# EAGLE board usb-interface (EAGLE 9.6.2)
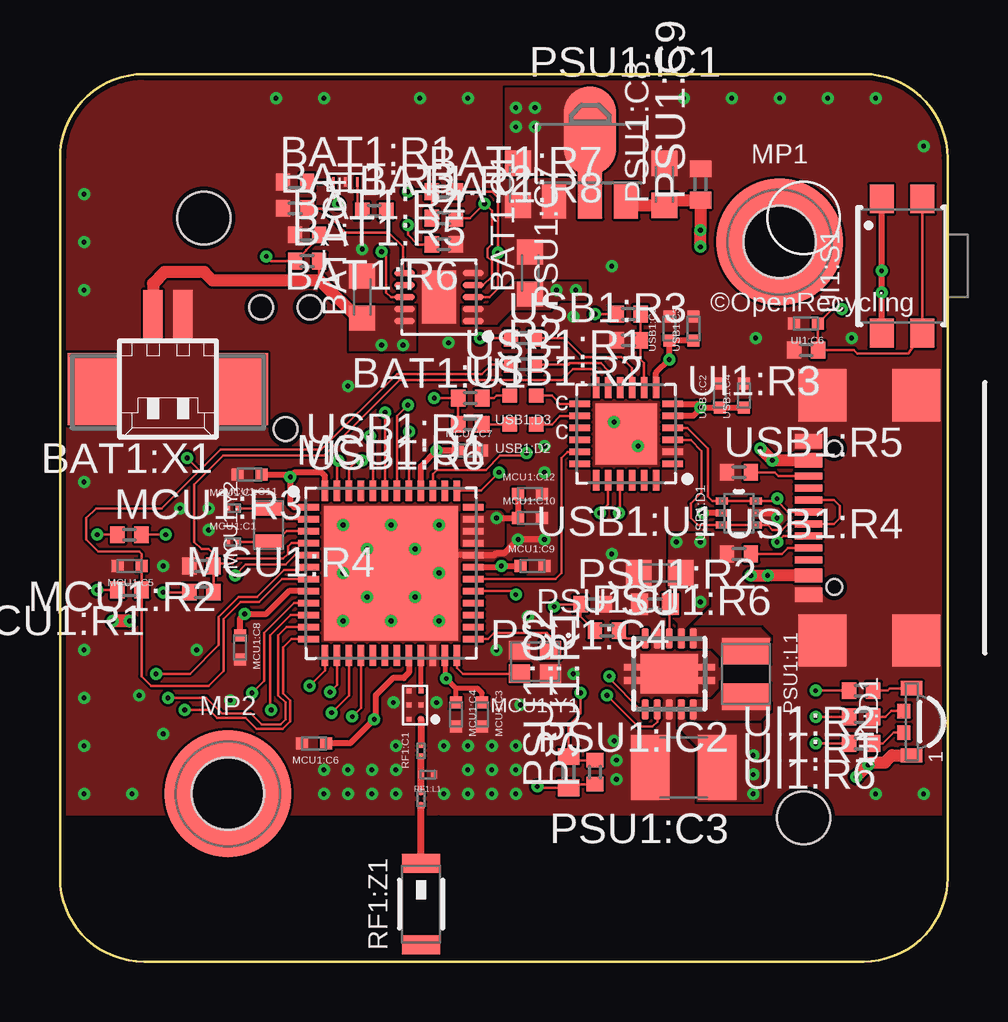
[diagram p0: board, top side]
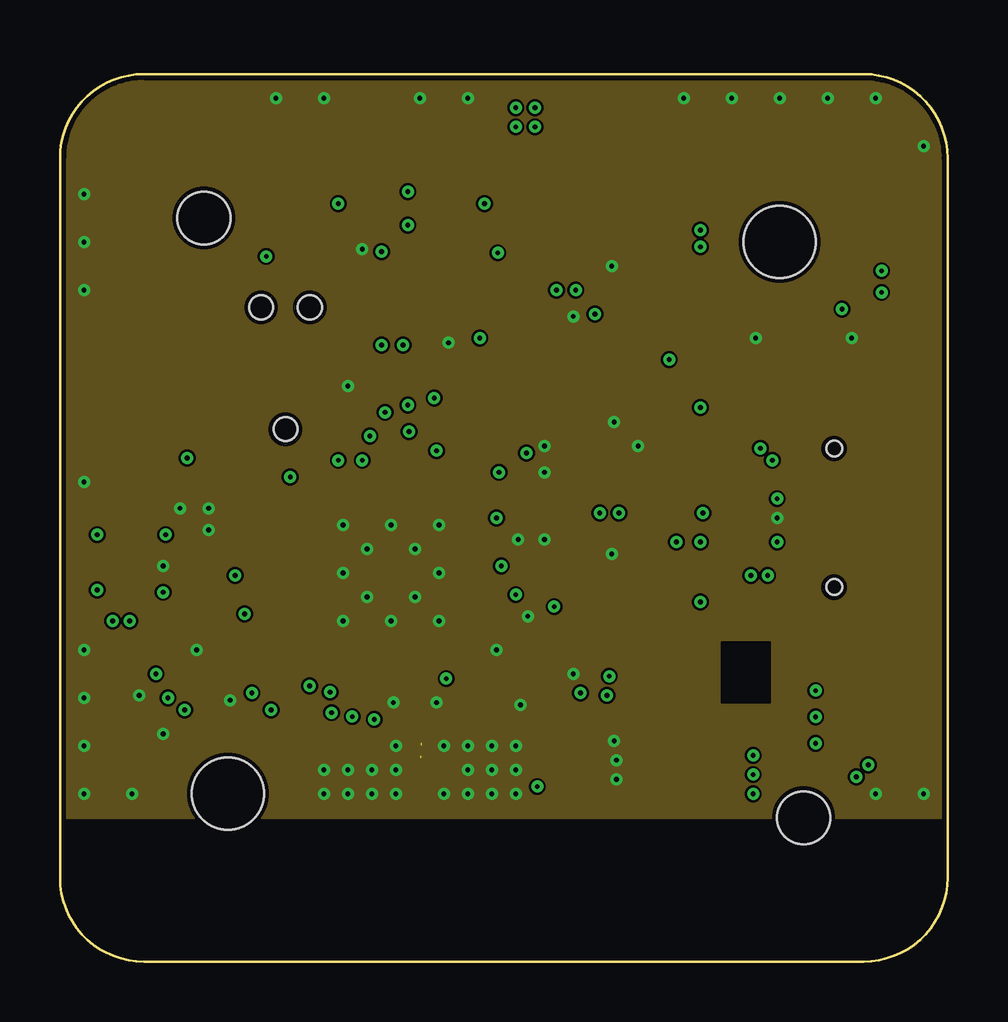
[diagram p1: board, inner layer Route2]
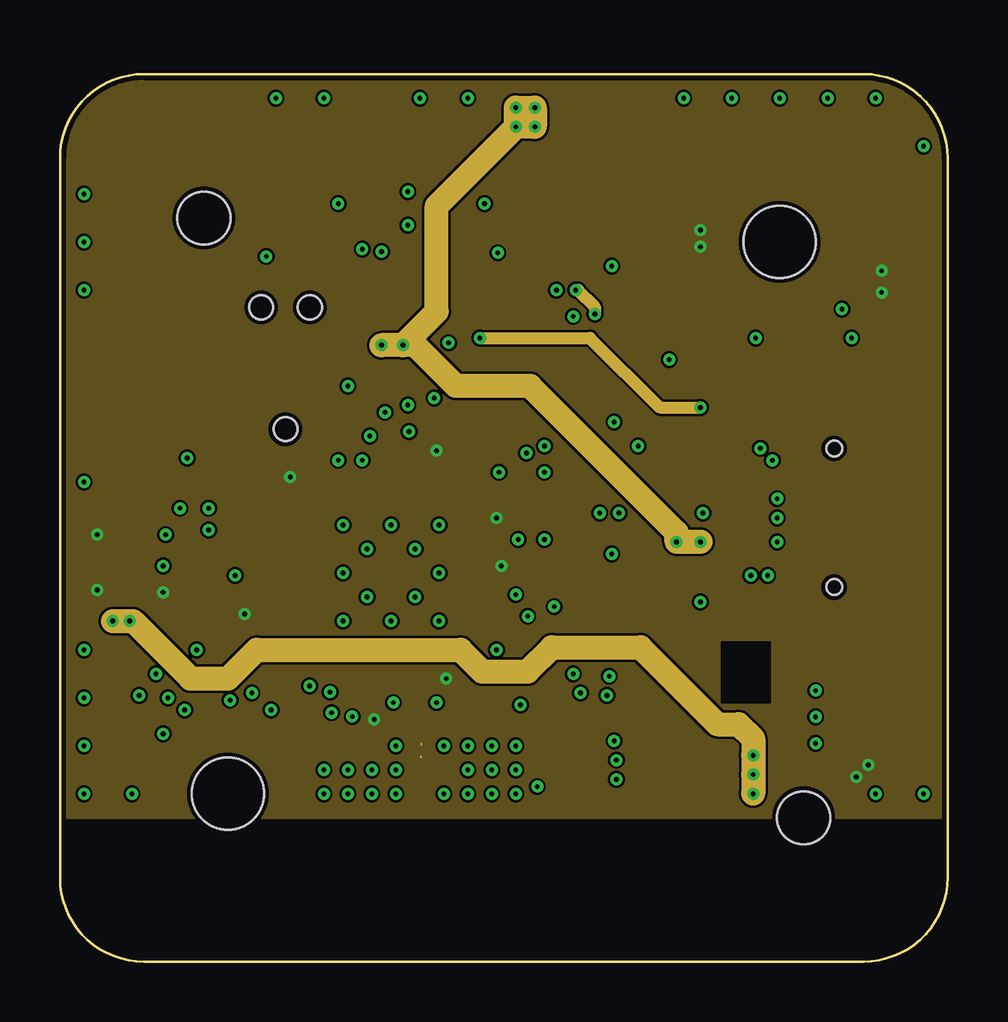
[diagram p2: board, inner layer Route15]
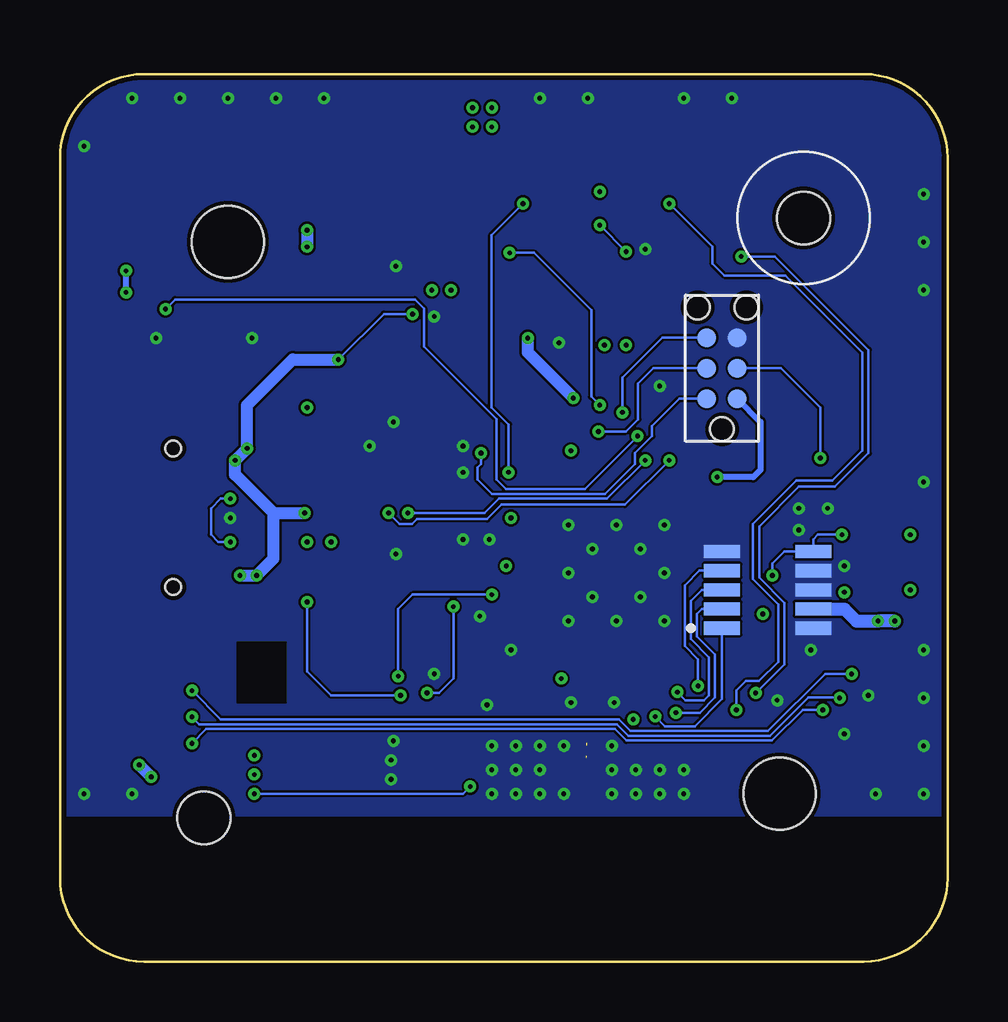
[diagram p3: board, bottom side, seen from below]

Size 37 x 37 mm. Coordinates in mm from the lower left corner, seen from the top.
Outline: 0,3.5 0,33.5 arc-90 3.5,37 33.5,37 arc-90 37,33.5 37,3.5 arc-90 33.5,0 3.5,0 arc-90 0,3.5
Copper layers (1+2*15+16): Top 0.035mm / dielectric 0.2mm / Route2 0.0175mm / dielectric 0.465mm / Route15 0.0175mm / dielectric 0.2mm / Bottom 0.035mm
Design rules "JLC4LayerRules *": minimum track width 0.1mm, minimum drill 0.2mm, track to track 0.1mm, track to pad 0.2mm, pad to pad 0.128mm, via to via 0.29mm, smd to smd 0mil, copper to edge 0.2mm, drill to drill 0.2mm, minimum pad ring 0.15mm, minimum via ring 0.15mm, stop-mask expansion 4mil, vias tented up to drill 0.2mm, thermal gap 10mil
Net classes: 0 default: width 0.1 mm, drill 0.2 mm, clearance 0.1 mm; 1 50Ohm: width 0.29 mm, clearance 0.2 mm
Holes 2.2 mm at 6,31 31,6

## Footprints (pad centres in the part's own frame; a part is rotated, then mirrored left to right if it is on the bottom)
C0603K = smd 1.05 x 1.08: 1 -0.875,0; 2 0.875,0
CSD18541F5 = smd 0.39 x 0.15: 1 0,0.5; 2 0,0; 3 0,-0.5
R0402 = smd 0.6 x 0.7: 1 -0.5,0; 2 0.5,0
SON50P300X300X100-11T140X220N = smd 0.86 x 0.264: 1 -1.435,1; 2 -1.435,0.5; 3 -1.435,0; 4 -1.435,-0.5; 5 -1.435,-1; 6 1.435,-1; 7 1.435,-0.5; 8 1.435,0; 9 1.435,0.5; 10 1.435,1 | smd 1.4 x 2.2: 11 0,0
53261-02 = smd 0.8 x 2: 1 0.625,-2.5; 2 -0.625,-2.5 | smd 2.1 x 3: S1 3.125,0.625; S2 -3.125,0.625
WCAP-CSRF_0201 = smd 0.21 x 0.3: 1 -0.22,0; 2 0.22,0
WCAP-CSGP_0402 = smd 0.5 x 0.5: 1 0.5,0; 2 -0.5,0
CSP-6 = smd 0.2 x 0.2: 1 -0.587,-0.5; 2 0,-0.5; 3 0.587,-0.5; 4 0.587,0; 5 0,0; 6 -0.587,0
QFN50P700X700X60-49T560N = smd 0.86 x 0.27: 1 -3.435,2.75; 2 -3.435,2.25; 3 -3.435,1.75; 4 -3.435,1.25; 5 -3.435,0.75; 6 -3.435,0.25; 7 -3.435,-0.25; 8 -3.435,-0.75; 9 -3.435,-1.25; 10 -3.435,-1.75; 11 -3.435,-2.25; 12 -3.435,-2.75; 25 3.435,-2.75; 26 3.435,-2.25; 27 3.435,-1.75; 28 3.435,-1.25; 29 3.435,-0.75; 30 3.435,-0.25; 31 3.435,0.25; 32 3.435,0.75; 33 3.435,1.25; 34 3.435,1.75; 35 3.435,2.25; 36 3.435,2.75 | smd 0.27 x 0.86: 13 -2.75,-3.435; 14 -2.25,-3.435; 15 -1.75,-3.435; 16 -1.25,-3.435; 17 -0.75,-3.435; 18 -0.25,-3.435; 19 0.25,-3.435; 20 0.75,-3.435; 21 1.25,-3.435; 22 1.75,-3.435; 23 2.25,-3.435; 24 2.75,-3.435; 37 2.75,3.435; 38 2.25,3.435; 39 1.75,3.435; 40 1.25,3.435; 41 0.75,3.435; 42 0.25,3.435; 43 -0.25,3.435; 44 -0.75,3.435; 45 -1.25,3.435; 46 -1.75,3.435; 47 -2.25,3.435; 48 -2.75,3.435 | smd 5.6 x 5.6: 49 0,0 | drill 0.2 pad 0.5: P$1 1,1; P$2 -1,1; P$3 -1,-1; P$4 1,-1; P$5 2,-2; P$6 0,-2; P$7 -2,-2; P$8 -2,0; P$9 -2,2; P$10 0,2; P$11 2,2; P$12 2,0
TC2030-NL = smd 0.787 x 0.787: 1 -0.635,-1.27; 2 0.635,-1.27; 3 -0.635,-2.54; 4 0.635,-2.54; 5 -0.635,-3.81; 6 0.635,-3.81 | hole 0.991: 0,0; -1.016,-5.08; 1.016,-5.08
WE-XTAL_IQXC-42 = smd 0.875 x 0.775: 1 -0.637,-0.487; 2 0.637,-0.487; 3 0.637,0.487; 4 -0.637,0.487
WE-XTAL_IQXC-25 = smd 0.6 x 1.1: 1 -0.7,0; 2 0.7,0
WA-SMSI_9774015243 = smd 5.3 x 5.3: 1 0,0 | hole 3: 0,0
C0402 = smd 0.7 x 0.9: 1 -0.65,0; 2 0.65,0
C1210 = smd 1.6 x 2.7: 1 -1.4,0; 2 1.4,0
SOT89 = smd 1 x 1.5: 1 -1.499,-1.981; 3 1.499,-1.981 | smd 1 x 2: 2 0,-1.727 | smd 2.2 x 3.7: 2@1 0,0.94
S-PDSO-N10 = smd 0.28 x 0.85: 1 -1,-1.475; 2 -0.5,-1.475; 3 0,-1.475; 4 0.5,-1.475; 5 1,-1.475; 6 1,1.475; 7 0.5,1.475; 8 0,1.475; 9 -0.5,1.475; 10 -1,1.475 | smd 2.4 x 1.65: PP 0,0 | smd 3.8 x 0.28: PP@1 0,0.275; PP@2 0,-0.275
WE-LQS_2512 = smd 1.1 x 2: 1 -0.95,0; 2 0.95,0
WE-TCI_0201 = smd 0.25 x 0.3: 1 -0.275,0; 2 0.275,0
WE-MCA_7488930245 = smd 0.8 x 1.6: 1 1.7,0; 2 -1.7,0
WL-SFSW_1204 = smd 0.6 x 0.9: 1 -1.4,0; 4 1.4,0 | smd 0.6 x 0.55: 2 -0.45,0.325; 3 0.45,0.325
4343X10458XX = smd 1.2 x 1: 1 2.8,0.85; 2 2.8,-0.85; 3 -2.8,0.85; 4 -2.8,-0.85
WE-TVS_SOT563 = smd 0.3 x 0.5: 1 -0.5,-0.7; 2 0,-0.7; 3 0.5,-0.7; 4 0.5,0.7; 5 0,0.7; 6 -0.5,0.7
WL-SMCC_0402 = smd 0.6 x 0.6: 1 -0.55,0; 2 0.55,0
QFN50P400X400X80-25T255N = smd 0.86 x 0.264: 1 -1.935,1.25; 2 -1.935,0.75; 3 -1.935,0.25; 4 -1.935,-0.25; 5 -1.935,-0.75; 6 -1.935,-1.25; 13 1.935,-1.25; 14 1.935,-0.75; 15 1.935,-0.25; 16 1.935,0.25; 17 1.935,0.75; 18 1.935,1.25 | smd 0.264 x 0.86: 7 -1.25,-1.935; 8 -0.75,-1.935; 9 -0.25,-1.935; 10 0.25,-1.935; 11 0.75,-1.935; 12 1.25,-1.935; 19 1.25,1.935; 20 0.75,1.935; 21 0.25,1.935; 22 -0.25,1.935; 23 -0.75,1.935; 24 -1.25,1.935 | smd 2.55 x 2.55: 25 0,0 | drill 0.2 pad 0.5: P$1 -0.5,0.5; P$2 0.5,-0.5
USBCGCT = smd 0.6 x 1.15: A1B12 -3.2,0; A4B9 -2.4,0; B1A12 3.2,0; B4A9 2.4,0 | smd 0.3 x 1.15: A5 -1.25,0; A6 -0.25,0; A7 0.25,0; A8 1.25,0; B5 1.75,0; B6 0.75,0; B7 -0.75,0; B8 -1.75,0 | smd 2.18 x 2: SHIELD@1 -5.11,-0.575; SHIELD@2 5.11,-0.575; SHIELD@3 5.11,-4.505; SHIELD@4 -5.11,-4.505 | hole 0.65: -2.89,-1.075; 2.89,-1.075
524651071 = smd 0.55 x 1.5: 1 -1.6,1.9; 2 -0.8,1.9; 3 0,1.9; 4 0.8,1.9; 5 1.6,1.9; 6 -1.6,-1.9; 7 -0.8,-1.9; 8 0,-1.9; 9 0.8,-1.9; 10 1.6,-1.9

## Placement (x,y rotation side)
BAT1:C1  4.7uF  [C0603K]  19.6,28.7 90 top
BAT1:C4  4.7uF  [C0603K]  12.6,27.7 90 top
BAT1:Q1  CSD18541F5  [CSD18541F5]  11.9,32.5 90 top
BAT1:R1  10k  [R0402]  9.8,32.5 0 top
BAT1:R2  1k  [R0402]  13.1,31.3 0 top
BAT1:R3  10k  [R0402]  9.8,31.4 0 top
BAT1:R4  10k  [R0402]  10.3,30.3 0 top
BAT1:R5  10k  [R0402]  10.3,29.2 0 top
BAT1:R6  10k  [R0402]  16,29.9 180 top
BAT1:R7  10k  [R0402]  16,32.1 0 top
BAT1:R8  10k  [R0402]  16,31 0 top
BAT1:U1  MCP73833  [SON50P300X300X100-11T140X220N]  15.8,27.7 180 top
BAT1:X1  53261-02  [53261-02]  4.5,24.5 180 top
MCU1:C1  9pF  [WCAP-CSRF_0201]  7.2,17.5 0 top
MCU1:C2  9pF  [WCAP-CSRF_0201]  7.2,18.9 0 top
MCU1:C3  100 pF  [WCAP-CSGP_0402]  17.6,10.3 270 top
MCU1:C4  100 nF  [WCAP-CSGP_0402]  16.5,10.3 270 top
MCU1:C5  100 nF  [WCAP-CSGP_0402]  2.9,16.5 180 top
MCU1:C6  100 nF  [WCAP-CSGP_0402]  10.6,9.1 180 top
MCU1:C7  100 nF  [WCAP-CSGP_0402]  17.1,21.3 0 top
MCU1:C8  100 nF  [WCAP-CSGP_0402]  7.5,13.1 270 top
MCU1:C9  100 nF  [WCAP-CSGP_0402]  19.7,16.5 0 top
MCU1:C10  1 µF  [WCAP-CSGP_0402]  19.6,18.5 0 top
MCU1:C11  100 nF  [WCAP-CSGP_0402]  7.9,20.3 180 top
MCU1:C12  100 nF  [WCAP-CSGP_0402]  19.6,19.5 0 top
MCU1:FLT1  MLPF-WB55-01E3  [CSP-6]  14.55,10.7 90 top
MCU1:R1  100k  [R0402]  2.9,15.5 180 top
MCU1:R2  100k  [R0402]  5.9,16.5 180 top
MCU1:R3  100k  [R0402]  2.9,17.8 0 top
MCU1:R4  0R  [R0402]  5.9,15.4 0 top
MCU1:U1  STM32WB30CE  [QFN50P700X700X60-49T560N]  13.8,16.2 0 top
MCU1:X1  TC2030-NLTC2030-IDC-NL-FP  [TC2030-NL]  9.4,22.2 180 bottom
MCU1:Y1  NX2016SA-32MHz  [WE-XTAL_IQXC-42]  19.8,12.5 180 top
MCU1:Y2  32.768kHz  [WE-XTAL_IQXC-25]  8.7,18.2 90 top
MP1  9774015243  [WA-SMSI_9774015243]  30,30 0 top
MP2  9774015243  [WA-SMSI_9774015243]  7,7 0 top
PSU1:C1  4.7uF  [C0603K]  25,16.2 180 top
PSU1:C2  33pF  [C0402]  21.2,7.9 90 top
PSU1:C3  4.7uF/25V  [C1210]  26,8.1 180 top
PSU1:C4  47nF  [C0402]  24.8,14.9 180 top
PSU1:C7  4.7uF  [C0603K]  19.1,32.4 270 top
PSU1:C8  4.7uF  [C0603K]  25.2,32.4 90 top
PSU1:C9  100nF  [C0402]  26.7,32.4 90 top
PSU1:IC1  MCP170333MB  [SOT89]  22.1,33.7 0 top
PSU1:IC2  TPS61080QFN10  [S-PDSO-N10]  25.4,12 180 top
PSU1:L1  4.7uH  [WE-LQS_2512]  28.6,12 270 top
PSU1:R1  437k  [R0402]  22.3,7.9 90 top
PSU1:R2  49.9k  [R0402]  22.2,14.9 0 top
PSU1:R6  100R  [R0402]  22.8,13.8 0 top
R2  0R  [R0402]  19.3,24.9 0 top
RF1:C1  1.2pF  [WCAP-CSRF_0201]  15.05,8.8 90 top
RF1:L1  2.7nH  [WE-TCI_0201]  15.32,7.8 180 top
RF1:L2  3.3nH  [WE-TCI_0201]  15.05,6.8 90 top
RF1:Z1  2400-2500 MHz  [WE-MCA_7488930245]  15.05,2.4 90 top
UI1:C6  100 nF  [WCAP-CSGP_0402]  31.1,26.6 180 top
UI1:D1  155124M173200  [WL-SFSW_1204]  35.5,10 90 top
UI1:R1  120R  [R0402]  33.4,10.2 180 top
UI1:R2  270R  [R0402]  33.4,11.3 180 top
UI1:R3  100k  [R0402]  31.1,25.5 180 top
UI1:R6  43R  [R0402]  33.4,9.1 180 top
UI1:S1  434331045822  [4343X10458XX]  35.1,29 90 top
USB1:C1  100 nF  [WCAP-CSGP_0402]  25.4,26.4 90 top
USB1:C2  100 nF  [WCAP-CSGP_0402]  27.5,23.6 90 top
USB1:C3  1 µF  [WCAP-CSGP_0402]  26.4,26.4 90 top
USB1:C4  1 µF  [WCAP-CSGP_0402]  28.5,23.6 90 top
USB1:D1  5Vdc  [WE-TVS_SOT563]  28.3,18.7 90 top
USB1:D2  150040GS73240  [WL-SMCC_0402]  19.3,22.4 180 top
USB1:D3  150040YS73240  [WL-SMCC_0402]  19.3,23.6 180 top
USB1:R1  22.1k  [R0402]  23.7,27 180 top
USB1:R2  47.5k  [R0402]  23.7,25.9 180 top
USB1:R3  1k  [R0402]  19.3,26 0 top
USB1:R4  5.1k  [R0402]  28.3,17 0 top
USB1:R5  5.1k  [R0402]  28.3,20.4 0 top
USB1:R6  1k  [R0402]  17.1,22.4 180 top
USB1:R7  1k  [R0402]  17.1,23.5 180 top
USB1:U1  CP2102N  [QFN50P400X400X80-25T255N]  23.6,22 180 top
USB1:X1  USB4110  [USBCGCT]  31.2,18.5 90 top
X1  524651071  [524651071]  7.5,15.5 90 bottom

## Library data of the parts
BAT1:C1 BAT1:C4 PSU1:C1-PSU1:C4 PSU1:C7-PSU1:C9 = rcl; SPICEPREFIX: C
BAT1:Q1 BAT1:U1 MCU1:FLT1 MCU1:U1 USB1:U1 = spectrometer
BAT1:R1-BAT1:R8 MCU1:R1-MCU1:R4 PSU1:R1 PSU1:R2 PSU1:R6 R2 UI1:R1-UI1:R3 UI1:R6 USB1:R1-USB1:R7 = rcl; SPICEPREFIX: R
BAT1:X1 = connectors; MF: MOLEX; OC_FARNELL: 1125373; OC_NEWARK: unknown
MCU1:C1 MCU1:C2 = Wurth_Capacitors_WCAP-CSRF; CERAMIC-TYPE: NP0 Class I; DATASHEET-URL: https://www.we-online.com/catalog/datasheet/885392004010.pdf; H: 0.3mm; PART-NUMBER: 885392004010; QMIN: 400+20C; RISO: 10GOhm; TECHNICAL-REFERENCE: NP002019R0D025DFCT1R000; TOL-C: ±0.5pF; VR: 25V(DC)
MCU1:C3 = Wurth_Capacitors_WCAP-CSGP; CERAMIC-TYPE: NP0 Class I; DATASHEET-URL: https://www.we-online.com/catalog/datasheet/885012005013.pdf; DF: -; H: 0.5mm; OPERATING-TEMPERATURE: -55 °C up to +125 °C; PART-NUMBER: 885012005013; QMIN: 1000; RISO: 10GOhm; TECHNICAL-REFERENCE: NP00402101J010DFCT10000; TOL-VALUE: ±5%; VR: 10V(DC)
MCU1:C4-MCU1:C9 MCU1:C11 MCU1:C12 UI1:C6 USB1:C1 USB1:C2 = Wurth_Capacitors_WCAP-CSGP; CERAMIC-TYPE: X5R Class II; DATASHEET-URL: https://www.we-online.com/catalog/datasheet/885012105010.pdf; DF: 5%; H: 0.5mm; OPERATING-TEMPERATURE: -55 °C up to +85 °C; PART-NUMBER: 885012105010; QMIN: -; RISO: 5GOhm; TECHNICAL-REFERENCE: X5R0402104M010DFCT10000; TOL-VALUE: ±20%; VR: 10V(DC)
MCU1:C10 USB1:C3 USB1:C4 = Wurth_Capacitors_WCAP-CSGP; CERAMIC-TYPE: X5R Class II; DATASHEET-URL: https://www.we-online.com/catalog/datasheet/885012105012.pdf; DF: 15%; H: 0.5mm; OPERATING-TEMPERATURE: -55 °C up to +85 °C; PART-NUMBER: 885012105012; QMIN: -; RISO: 0.05GOhm; TECHNICAL-REFERENCE: X5R0402105M010DFCT10000; TOL-VALUE: ±20%; VR: 10V(DC)
MCU1:X1 USB1:X1 X1 = connectors
MCU1:Y1 = Wurth_Quartz Crystals & Oscillators_WE-XTAL; C-LOAD: 10pF; DATASHEET-URL: https://www.we-online.com/catalog/datasheet/830059597.pdf; MOUNT: SMT; PART-NUMBER: 830059597; STABILITY: 20ppm; TOLERANCE: ±15ppm
MCU1:Y2 = Wurth_Quartz Crystals & Oscillators_WE-XTAL; C-LOAD: 9pF; DATASHEET-URL: https://www.we-online.com/catalog/datasheet/830062558.pdf; MOUNT: SMT; PART-NUMBER: 830062558; TOLERANCE: ±10ppm
MP1 MP2 = Wurth_Assembly_WA-SMSI; DATASHEET-URL: https://www.we-online.de/katalog/datasheet/9774015243.pdf; INNER-DIAMETER: 2.8mm; INNER-THREAD-LENGTH: -; OUTER-DIAMETER: 4.35mm; PART-NUMBER: 9774015243; PIN-LENGTH: 1.5mm; THREAD: M2
PSU1:IC1 = linear
PSU1:IC2 = spectrometer; MPN: TPS61080DRCT; OC_FARNELL: 1412517; OC_NEWARK: 30M1831
PSU1:L1 = Wurth_Power Magnetics_WE-LQS; DATASHEET-URL: https://www.we-online.com/catalog/datasheet/74404024047.pdf; FRES: 52MHz; IR: 1.12A; ISAT: 1.2A; PART-NUMBER: 74404024047; RDC: 173mOhm
RF1:C1 = Wurth_Capacitors_WCAP-CSRF; CERAMIC-TYPE: NP0 Class I; DATASHEET-URL: https://www.we-online.com/catalog/datasheet/885392004003.pdf; H: 0.3mm; PART-NUMBER: 885392004003; QMIN: 400+20C; RISO: 10GOhm; TECHNICAL-REFERENCE: NP002011R2B025DFCT1R000; TOL-C: ±0.1pF; VR: 25V(DC)
RF1:L1 = Wurth_Signal & Communications_WE-TCI; DATASHEET-URL: https://katalog.we-online.com/pbs/datasheet/744900027.pdf; FRES: 8GHz; IR: 150mA; MOUNT: SMT; PART-NUMBER: 744900027; Q-FACTOR: 8; RDC: 0.8Ohm
RF1:L2 = Wurth_Signal & Communications_WE-TCI; DATASHEET-URL: https://katalog.we-online.com/pbs/datasheet/744900033.pdf; FRES: 6GHz; IR: 150mA; MOUNT: SMT; PART-NUMBER: 744900033; Q-FACTOR: 8; RDC: 1Ohm
RF1:Z1 = Wurth_Signal & Communications_WE-MCA; DATASHEET-URL: https://katalog.we-online.com/pbs/datasheet/7488930245.pdf; MOUNT: SMT; PART-NUMBER: 7488930245; PEAK-GAIN: 0.5dB; VSWR: 2; Z: 50Ohm
UI1:D1 USB1:D2 USB1:D3 = Wurth_Elektronik_Optoelectronics_rev19b
UI1:S1 = Wurth_Switch_WS-TASU; DATASHEET-URL: https://www.we-online.com/catalog/datasheet/434331045822.pdf; H: 1.65mm; OPERATION-FORCE: 220g; PART-NUMBER: 434331045822; QTY: 3300
USB1:D1 = Wurth_EMC Components_WE-TVS; C-CH: 2pF; CHANNELS: 2+1; DATASHEET-URL: https://www.we-online.com/catalog/datasheet/82400152.pdf; IPEAK: 6A; MOUNT: SMT; PART-NUMBER: 82400152; VBR: 6V

## Nets
+3V3: MCU1:C3.2 MCU1:C4.2 MCU1:C6.2 MCU1:C7.2 MCU1:C8.2 MCU1:C9.2 MCU1:C10.2 MCU1:C11.2 MCU1:C12.2 MCU1:R1.2 MCU1:R3.1 MCU1:R4.1 MCU1:U1.1 MCU1:U1.8 MCU1:U1.20 MCU1:U1.23 MCU1:U1.31 MCU1:U1.33 MCU1:U1.34 MCU1:U1.35 MCU1:U1.40 MCU1:U1.48 MCU1:X1.1 PSU1:C8.1 PSU1:C9.1 PSU1:IC1.3 UI1:D1.1 UI1:S1.1 UI1:S1.3
+5V: BAT1:C1.1 BAT1:U1.1 BAT1:U1.2 USB1:C1.2 USB1:C3.2 USB1:D1.5 USB1:R1.2 USB1:U1.7 USB1:X1.A4B9 USB1:X1.B4A9
BAT1:+3V3: BAT1:R7.1 BAT1:R8.1
BAT1:N$1: BAT1:Q1.3 BAT1:R2.1
BAT1:PROG: BAT1:R2.2 BAT1:R3.2 BAT1:U1.6
BAT1:THERM: BAT1:R6.2 BAT1:U1.8
BLUE: MCU1:U1.12 UI1:R6.2
BOOT0: MCU1:R2.1 MCU1:R4.2 MCU1:U1.4 USB1:U1.12
CLK: MCU1:U1.14 X1.3
CS: MCU1:U1.13 X1.4
ENABLE_12V: MCU1:U1.29 PSU1:IC2.6
GND: BAT1:C1.2 BAT1:C4.2 BAT1:Q1.2 BAT1:R1.1 BAT1:R3.1 BAT1:R4.1 BAT1:R6.1 BAT1:U1.5 BAT1:U1.11 BAT1:X1.2 MCU1:C1.1 MCU1:C2.1 MCU1:C3.1 MCU1:C4.1 MCU1:C5.1 MCU1:C6.1 MCU1:C7.1 MCU1:C8.1 MCU1:C9.1 MCU1:C10.1 MCU1:C11.1 MCU1:C12.1 MCU1:FLT1.2 MCU1:FLT1.4 MCU1:FLT1.5 MCU1:FLT1.6 MCU1:R2.2 MCU1:U1.22 MCU1:U1.32 MCU1:U1.49 MCU1:U1.P$1 MCU1:U1.P$2 MCU1:U1.P$3 MCU1:U1.P$4 MCU1:U1.P$5 MCU1:U1.P$6 MCU1:U1.P$7 MCU1:U1.P$8 MCU1:U1.P$9 MCU1:U1.P$10 MCU1:U1.P$11 MCU1:U1.P$12 MCU1:X1.5 MCU1:Y1.2 MCU1:Y1.4 PSU1:C1.2 PSU1:C3.2 PSU1:C4.2 PSU1:C7.2 PSU1:C8.2 PSU1:C9.2 PSU1:IC1.1 PSU1:IC2.4 PSU1:IC2.8 PSU1:IC2.PP PSU1:IC2.PP@1 PSU1:IC2.PP@2 PSU1:R2.2 RF1:L1.1 UI1:C6.1 UI1:R3.2 USB1:C1.1 USB1:C2.1 USB1:C3.1 USB1:C4.1 USB1:D1.2 USB1:R2.2 USB1:R4.1 USB1:R5.1 USB1:U1.2 USB1:U1.25 USB1:U1.P$1 USB1:U1.P$2 USB1:X1.A1B12 USB1:X1.B1A12 USB1:X1.SHIELD@1 USB1:X1.SHIELD@2 USB1:X1.SHIELD@3 USB1:X1.SHIELD@4 X1.5 X1.6 X1.8 X1.9
GREEN: MCU1:U1.11 UI1:R1.2
I_LIM: BAT1:Q1.1 BAT1:R1.2 MCU1:U1.10
MCU1:AT0: MCU1:U1.26
MCU1:AT1: MCU1:U1.27
MCU1:N$1: MCU1:FLT1.3 MCU1:U1.21
MCU1:OSC32_IN: MCU1:C2.2 MCU1:U1.2 MCU1:Y2.2
MCU1:OSC32_OUT: MCU1:C1.2 MCU1:U1.3 MCU1:Y2.1
MCU1:OSC_IN: MCU1:U1.25 MCU1:Y1.1
MCU1:OSC_OUT: MCU1:U1.24 MCU1:Y1.3
MCU1:SWCLK: MCU1:U1.41 MCU1:X1.4
MCU1:SWDIO: MCU1:U1.39 MCU1:X1.2
MCU1:SWO: MCU1:U1.43 MCU1:X1.6
MISO: MCU1:U1.15 X1.2
MOSI: MCU1:U1.16 X1.1
NRST: MCU1:C5.2 MCU1:R1.1 MCU1:U1.7 MCU1:X1.3 R2.1
NSHDN: MCU1:R3.2 MCU1:U1.5 X1.10
PSU1:N$1: PSU1:IC2.1 PSU1:L1.1
PSU1:N$2: PSU1:IC2.10 PSU1:L1.2
PSU1:N$3: PSU1:C4.1 PSU1:IC2.3
PSU1:N$4: PSU1:C2.2 PSU1:R1.2 PSU1:R2.1 PSU1:R6.1
PSU1:N$5: PSU1:IC2.5 PSU1:R6.2
RED: MCU1:U1.6 UI1:R2.2
RF [50Ohm]: MCU1:FLT1.1 RF1:C1.2
RF1:FEED [50Ohm]: RF1:L2.1 RF1:Z1.1
RF1:MATCH [50Ohm]: RF1:C1.1 RF1:L1.2 RF1:L2.2
RX: MCU1:U1.47 USB1:U1.21
STAT1: BAT1:R7.2 BAT1:U1.3 MCU1:U1.42
STAT2: BAT1:R8.2 BAT1:U1.4 MCU1:U1.37
SUSPENDED: MCU1:U1.30 USB1:U1.17
SWITCH: MCU1:U1.44 UI1:C6.2 UI1:R3.1 UI1:S1.2 UI1:S1.4
TX: MCU1:U1.46 USB1:U1.20
UI1:N$1: UI1:D1.2 UI1:R6.1
UI1:N$2: UI1:D1.3 UI1:R1.1
UI1:N$3: UI1:D1.4 UI1:R2.1
USB1:+3V3: USB1:C2.2 USB1:C4.2 USB1:R3.1 USB1:R6.2 USB1:R7.2 USB1:U1.5 USB1:U1.6
USB1:CC1: USB1:R4.2 USB1:X1.A5
USB1:CC2: USB1:R5.2 USB1:X1.B5
USB1:CP_NRST: USB1:R3.2 USB1:U1.9
USB1:D_N [differential]: USB1:D1.3 USB1:D1.4 USB1:U1.4 USB1:X1.A7 USB1:X1.B7
USB1:D_P [differential]: USB1:D1.1 USB1:D1.6 USB1:U1.3 USB1:X1.A6 USB1:X1.B6
USB1:N$1: USB1:D3.2 USB1:R7.1
USB1:N$2: USB1:D2.2 USB1:R6.1
USB1:RXT: USB1:D3.1 USB1:U1.13
USB1:TXT: USB1:D2.1 USB1:U1.14
USB1:VBUS: USB1:R1.1 USB1:R2.1 USB1:U1.8
USB_NRST: R2.2 USB1:U1.11
V+: PSU1:C2.1 PSU1:C3.1 PSU1:IC2.9 PSU1:R1.1 X1.7
VBAT: BAT1:C4.1 BAT1:R5.2 BAT1:U1.9 BAT1:U1.10 BAT1:X1.1 PSU1:C1.1 PSU1:C7.1 PSU1:IC1.2@1 PSU1:IC2.2 PSU1:IC2.7
VBAT_SENSE: BAT1:R4.2 BAT1:R5.1 MCU1:U1.9

## Tracks (layer width: path | path; a pad name or v marks a point on that pad's centre or on a via)
+3V3  (via drill 0.2 pad 0.5)
  Top 0.1: MCU1:R1.2 v1.55,15.5 | MCU1:R3.1 v1.55,17.8 | MCU1:R4.1 v4.3,15.4
  Top 0.2: MCU1:C4.2 16.5,11.4 | MCU1:U1.23 16.05,11.85 v16.1,11.8 16.5,11.4 | 16.5,11.4 17.4,11.4 17.6,11.2 MCU1:C3.2
  Top 0.25: MCU1:U1.20 14.55,12.05 14.33,11.83 13.88,11.83 13.17,11.12 13.17,10.26 13.1,10.19 v13.1,10.1 12.1,9.1 MCU1:C6.2 | MCU1:U1.40 15.05,20.65 v15.7,21.3 MCU1:C7.2 v15.7,21.3 | MCU1:C8.2 7.5,14.3 v7.7,14.5 8.6,14.5 9.55,15.45 MCU1:U1.8 | MCU1:C11.2 9.5,20.3 v9.6,20.2 | v9.6,20.2 9.6,19.1 9.75,18.95 MCU1:U1.1 | MCU1:U1.48 11.05,20.25 10.9,20.4 9.8,20.4 v9.6,20.2 | MCU1:U1.31 18.35,16.45 v18.4,16.5 MCU1:C9.2 | MCU1:C12.2 MCU1:C10.2 19.1,18.4 19,18.5 v18.2,18.5 18.15,18.45 | UI1:S1.3 v34.25,27.9 v34.25,28.8 UI1:S1.1
  Top 0.5: PSU1:IC1.3 23.79,31.52 PSU1:C8.1 25.43,31.75 PSU1:C9.1 v26.7,30.5 v26.7,29.8 | v33.2,7.7 v33.7,8.2 33.8,8.3 34.39,8.3 34.69,8.6 UI1:D1.1
  Bottom 0.25: MCU1:X1.1 7.8,22.5 7.8,20.5 8.1,20.2 v9.6,20.2 | v34.25,27.9 v34.25,28.8
  Bottom 0.5: v26.7,30.5 v26.7,29.8 | v33.2,7.7 v33.7,8.2
  pour Top (no thermals): 16.8,18.7 18.3,18.7 18.4,18.6 18.4,17.4 16.8,17.4
  pour Route15 (no thermals): 0,6.5 0,6 37,6 37,33.5 arc90 33.5,37 32.5,37 4.5,37 3.5,37 arc90 0,33.5 0,28.5
+5V  (via drill 0.2 pad 0.5)
  Top 0.1: v22.3,27 USB1:R1.2
  Top 0.25: USB1:D1.5 v26.8,18.7 | USB1:U1.7 24.85,24.55 v25.4,25.1 USB1:C1.2 USB1:C3.2
  Top 0.5: USB1:X1.A4B9 v29.5,16.1 v28.8,16.1 | USB1:X1.B4A9 v29.7,20.9 v29.2,21.4
  Route15 0.5: v21.5,28 21.6,28 22.3,27.3 v22.3,27
  Bottom 0.1: v25.4,25.1 23.5,27 v22.3,27
  Bottom 0.5: v29.5,16.1 v28.8,16.1 28.1,16.8 28.1,18.7 | 28.1,18.7 v26.8,18.7 | 28.1,18.7 29.7,20.3 v29.7,20.9 v29.2,21.4 29.2,23.2 27.3,25.1 v25.4,25.1
  other vias: 20.7,28
  pour Top (no thermals): 16.8,26.6 16.8,27.3 17.9,27.3 18.9,28.3 21.9,28.3 21.9,27.6 20.8,27.6 20.4,27.2 18.8,27.2 18.2,26.6
BAT1:+3V3  (via drill 0.2 pad 0.5)
  Top 0.1: BAT1:R8.1 BAT1:R7.1 v14.5,32.1
BAT1:N$1
  Top 0.1: BAT1:R2.1 12.4,31.5 BAT1:Q1.3
BAT1:PROG
  Top 0.1: BAT1:U1.6 14.3,28.77 14.3,29.8 13.7,30.4 | 13.7,30.4 11.9,30.4 10.9,31.4 BAT1:R3.2 | BAT1:R2.2 13.7,31.2 13.7,30.4
BAT1:THERM  (via drill 0.2 pad 0.5)
  Top 0.1: BAT1:U1.8 13.8,27.7 13.6,27.9 13.6,29.4 v13.4,29.6 | v14.5,30.7 14.5,30.3 14.9,29.9 BAT1:R6.2
  Bottom 0.1: v13.4,29.6 v14.5,30.7
BLUE  (via drill 0.2 pad 0.5)
  Top 0.1: MCU1:U1.12 9.65,13.45 9.3,13.1 9.3,11.18 9.6,10.88 9.6,10.02 9.28,9.7 8.2,9.7 7.74,10.16 6.56,10.16 6.22,10.5 v5.2,10.5 | UI1:R6.2 v31.5,9.1
  Bottom 0.1: v5.2,10.5 6.03,10.5 7.32,9.22 13.39,9.22 13.87,9.7 30.9,9.7 v31.5,9.1
BOOT0
  Top 0.1: MCU1:U1.4 9.65,17.45 9.5,17.3 9.5,17 9.3,16.8 7.4,16.8 7.2,16.6 6.5,16.6 MCU1:R2.1 | USB1:U1.12 22.35,24.55 22.2,24.7 21.39,24.7 20.95,24.25 14.15,24.25 11,21.1 6.8,21.1 5.6,19.9 5.6,17.5 5.9,17.2 6.2,17.2 6.4,17 MCU1:R2.1 | MCU1:R4.2 MCU1:R2.1
CLK  (via drill 0.2 pad 0.5)
  Top 0.1: v11.26,11.24 11.55,11.53 MCU1:U1.14
  Bottom 0.1: X1.3 10.25,15.5 10.71,15.04 10.71,13.45 9.95,12.69 9.95,11.1 10.15,10.9 10.92,10.9 v11.26,11.24
CS  (via drill 0.2 pad 0.5)
  Top 0.1: v10.4,11.5 11.05,12.15 MCU1:U1.13
  Bottom 0.1: X1.4 10.35,16.3 10.96,15.69 10.96,13.16 10.4,12.6 v10.4,11.5
ENABLE_12V  (via drill 0.2 pad 0.5)
  Top 0.1: v22.9,11.9 22.9,11.8 24.18,10.53 PSU1:IC2.6 | MCU1:U1.29 18.85,15.45 v19,15.3
  Bottom 0.1: v19,15.3 22.3,15.3 22.9,14.7 v22.9,11.9
GND  (via drill 0.2 pad 0.5)
  Top 0.25: MCU1:U1.P$12 16.55,16.95 MCU1:U1.32 18.1,16.95 18.18,17.03 18.53,17.03 v19.1,17.6 v20.2,17.6 | USB1:D1.2 29.7,18.7 v29.9,18.5
  other vias: 18.2,13 15.7,10.8 21.4,12 13.9,10.8 6.2,18.9 6.2,18 20.2,21.5 20.2,20.4 5,18.9 4.3,16.5 12.6,29.7 23.2,7.6 23.2,8.4 23.1,9.2 19.5,14.4 19.2,10.7 21.4,26.9 1,7 1,9 1,11 1,13 1,20 1,28 1,30 1,32 9,36 11,36 15,36 17,36 26,36 34,36 36,34 32,36 30,36 28,36 36,7 34,7 12,7 19,9 4.3,9.5 3.3,11.1 23,17 33,26 29,26 23,29 12,24 16.2,25.8 12,8 11,7 13,8 11,8 18,8 17,8 13,7 14,7 14,8 14,9 16,9 17,9 16,7 17,7 18,7 19,7 19,8 18,9 5.7,13 7.1,10.9 3,7
  cutout Top (no thermals): 15.8,6 37,6 37,0 33.1,0 0,0 0,6
  pour Bottom (no thermals): 0,6.1 37,6.1 37,33.6 arc90 33.6,37 3.4,37 arc90 0,33.6
  pour Route2 (no thermals): 0,6 37,6 37,33.5 arc90 33.5,37 3.5,37 arc90 0,33.5 0,21.5
  pour Top (rank 6, no thermals): 0,6 0,33.5 arc-90 3.5,37 26,37 33.5,37 arc-90 37,33.5 37,14 37,6
  cutout Top: 27.7,13.3 29.6,13.3 29.6,10.8 27.7,10.8
  cutout Route15: 27.6,13.3 29.6,13.3 29.6,10.8 27.6,10.8
GND1
  cutout Route2: 27.6,13.3 29.6,13.3 29.6,10.8 27.6,10.8
GND2
  cutout Bottom: 27.6,13.3 29.6,13.3 29.6,10.8 27.6,10.8
GREEN  (via drill 0.2 pad 0.5)
  Top 0.1: MCU1:U1.11 9.45,13.95 9.1,13.6 9.1,11.1 9.4,10.8 9.4,10.1 9.2,9.9 8.4,9.9 7.95,10.35 6.75,10.35 6.1,11 v4.5,11 | UI1:R1.2 v31.5,10.2
  Bottom 0.1: v31.5,10.2 31.2,9.9 13.79,9.9 13.31,9.42 7.4,9.42 5.81,11.01 v4.51,11.01 v4.5,11
I_LIM  (via drill 0.2 pad 0.5)
  Top 0.1: MCU1:U1.10 9.61,14.45 8.75,13.6 8.75,10.55 v8.8,10.5 | BAT1:R1.2 BAT1:Q1.1 11.4,31.8 v11.6,31.6
  Bottom 0.1: v11.6,31.6 9.8,29.8 9.8,29.1 9.3,28.6 6.76,28.6 3.55,25.39 3.55,21.3 4.8,20.05 6.3,20.05 8.11,18.25 8.11,15.95 7.05,14.9 7.05,12.51 7.86,11.7 8.4,11.7 8.8,11.3 v8.8,10.5
MCU1:N$1
  Top 0.2: MCU1:FLT1.3 MCU1:U1.21
MCU1:OSC32_IN
  Top 0.1: MCU1:U1.2 9.45,18.45 9,18.9 MCU1:Y2.2 MCU1:C2.2
MCU1:OSC32_OUT
  Top 0.1: MCU1:U1.3 9.45,17.95 9,17.5 MCU1:Y2.1 MCU1:C1.2
MCU1:OSC_IN
  Top 0.1: MCU1:Y1.1 20.44,13.56 20.3,13.7 18.1,13.7 17.85,13.45 MCU1:U1.25
MCU1:OSC_OUT
  Top 0.1: MCU1:U1.24 16.55,12.25 16.8,12 MCU1:Y1.3
MCU1:SWCLK  (via drill 0.2 pad 0.5)
  Top 0.1: MCU1:U1.41 v14.55,22.1
  Bottom 0.1: v14.55,22.1 13.4,22.1 12.9,22.6 12.9,24.1 12.26,24.74 MCU1:X1.4
MCU1:SWDIO  (via drill 0.2 pad 0.5)
  Top 0.1: MCU1:U1.39 15.55,20.34 15.71,20.5 17.75,20.5 18.35,21.1 19.35,21.1 v19.45,21.2
  Bottom 0.1: MCU1:X1.2 11.17,23.47 12.32,22.32 12.32,21.91 13.03,21.2 13.03,20.75 14.28,19.5 19,19.5 19.6,20.1 19.6,20.6 19.45,20.75 v19.45,21.2
MCU1:SWO  (via drill 0.2 pad 0.5)
  Top 0.1: MCU1:U1.43 v13.55,22.9
  Bottom 0.1: MCU1:X1.6 11.89,26.01 13.55,24.35 v13.55,22.9
MISO  (via drill 0.2 pad 0.5)
  Top 0.1: v11.32,10.38 12.05,11.11 MCU1:U1.15
  Bottom 0.1: X1.2 10.25,14.7 10.45,14.49 10.45,13.56 9.7,12.81 9.7,11.01 10.33,10.38 v11.32,10.38
MOSI  (via drill 0.2 pad 0.5)
  Top 0.1: v12.18,10.22 12.55,10.58 MCU1:U1.16
  Bottom 0.1: X1.1 9.4,10.95 10.53,9.82 11.78,9.82 v12.18,10.22
NRST  (via drill 0.2 pad 0.5)
  Top 0.1: MCU1:U1.7 9.25,15.95 8.3,15 7.54,15 6.82,14.28 6.82,12.12 6.2,11.5 3.8,11.5 3.4,11.9 MCU1:R1.1 MCU1:C5.2 3.4,17 3.3,17.1 1.6,17.1 1.1,17.6 1.1,18.5 1.5,18.9 4.24,18.9 5.82,20.48 | 5.82,20.48 6.7,21.35 10.89,21.35 14.04,24.5 17.6,24.5 18,24.9 R2.1 | v5.3,21 5.82,20.48
  Bottom 0.1: MCU1:X1.3 6.94,24.74 5.3,23.1 v5.3,21
NSHDN  (via drill 0.2 pad 0.5)
  Top 0.1: MCU1:U1.5 9.81,16.95 9.4,16.55 7.75,16.55 v7.3,16.1 | MCU1:R3.2 v4.4,17.8
  Bottom 0.1: v7.3,16.1 7.3,16.6 6.8,17.1 X1.10 5.6,17.6 5.4,17.8 v4.4,17.8
PSU1:N$1
  pour Top (rank 2, no thermals): 27.6,12.4 29.6,12.4 29.6,13.5 29.2,13.9 26.3,13.9 26.3,13.1 27.2,13.1 27.6,12.7
PSU1:N$2
  pour Top (rank 2, no thermals): 26.3,10.9 26.3,10.1 29.2,10.1 29.6,10.5 29.6,11.6 27.6,11.6 27.6,11.3 27.2,10.9
PSU1:N$3
  Top 0.1: PSU1:IC2.3 25.4,14.85 PSU1:C4.1
PSU1:N$4  (via drill 0.2 pad 0.5)
  Top 0.1: PSU1:R1.2 21.35,8.4 PSU1:C2.2 21.2,9.85 21.7,10.35 v21.7,11.2 | v20.6,14.8 20.7,14.9 PSU1:R2.1 21.7,14.4 PSU1:R6.1
  Bottom 0.1: v21.7,11.2 21.2,11.2 20.6,11.8 v20.6,14.8
PSU1:N$5
  Top 0.1: PSU1:R6.2 23.62,13.47 PSU1:IC2.5
RED  (via drill 0.2 pad 0.5)
  Top 0.1: MCU1:U1.6 10.25,16.34 9.35,16.34 8.22,15.2 7.45,15.2 6.62,14.37 6.62,13.2 5.42,12 v4,12 | UI1:R2.2 v31.5,11.3
  Bottom 0.1: v4,12 5.1,12 7.48,9.62 13.22,9.62 13.71,10.1 30.3,10.1 v31.5,11.3
RF  (1 unrouted)
  Top 0.29: MCU1:FLT1.1 15.05,9.12
RF1:FEED
  Top 0.29: RF1:Z1.1 RF1:L2.1
RF1:MATCH  (1 unrouted)
  Top 0.29: RF1:L2.2 RF1:L1.2 15.05,8.5
RX  (via drill 0.2 pad 0.5)
  Top 0.1: MCU1:U1.47 11.55,20.85 v11.6,20.9 | v23.3,18.7 23.3,18.71 23.35,18.77 USB1:U1.21
  Bottom 0.1: v11.6,20.9 13.45,19.05 18.59,19.05 19.2,18.45 22.11,18.45 22.31,18.25 22.85,18.25 v23.3,18.7
STAT1  (via drill 0.2 pad 0.5)
  Top 0.1: BAT1:R7.2 18,32.1 18.25,31.85 v18.25,29.55 18.25,28.05 17.9,27.7 BAT1:U1.3 | MCU1:U1.42 14.05,22.75 v14.5,23.2
  Bottom 0.1: v14.5,23.2 14.85,23.55 14.85,27.15 17.25,29.55 v18.25,29.55
STAT2  (via drill 0.2 pad 0.5)
  Top 0.1: BAT1:U1.4 17.64,28.2 18,28.57 18,29.2 17.82,29.37 17.82,29.73 18,29.9 18,31.3 v17.7,31.6 17.1,31 BAT1:R8.2 | v18.3,20.4 18.3,20.39 17.55,19.64 MCU1:U1.37
  Bottom 0.1: v17.7,31.6 19,30.3 19,23.1 18.3,22.39 v18.3,20.4
SUSPENDED
  Top 0.1: MCU1:U1.30 20.65,15.95 20.9,16.2 20.9,21 21.15,21.25 USB1:U1.17
SWITCH  (via drill 0.2 pad 0.5)
  Top 0.1: MCU1:U1.44 13.05,21.75 12.9,21.9 v12.92,21.92 | UI1:S1.2 UI1:S1.4 35.37,25.35 33.25,25.35 33.1,25.5 UI1:R3.1 UI1:C6.2 32.2,27.2 v32.6,27.2
  Bottom 0.1: v12.92,21.92 12.92,21.9 15.12,19.7 18.41,19.7 18.8,20.09 18.8,22.61 21.83,25.64 21.83,27.23 22.2,27.6 32.2,27.6 v32.6,27.2
TX  (via drill 0.2 pad 0.5)
  Top 0.1: USB1:U1.20 22.85,19.05 v22.5,18.7 | v12.6,20.9 12.4,20.9 12.05,20.55 MCU1:U1.46
  Bottom 0.1: v22.5,18.7 19.3,18.7 18.7,19.3 14.2,19.3 v12.6,20.9
UI1:N$1
  Top 0.1: UI1:D1.2 34.75,9.55 34.3,9.1 UI1:R6.1
UI1:N$2
  Top 0.1: UI1:R1.1 34.4,10.2 34.65,10.45 UI1:D1.3
UI1:N$3
  Top 0.1: UI1:R2.1 34.5,11.3 34.6,11.4 UI1:D1.4
USB1:+3V3  (via drill 0.2 pad 0.5)
  Top 0.1: USB1:R6.2 USB1:R7.2 v15.6,23.5 | USB1:R3.1 v17.5,26
  Top 0.25: USB1:U1.6 26.55,23.25 v26.7,23.1 | v26.7,23.1 USB1:C2.2 USB1:C4.2 | USB1:U1.5 26.4,22.75 26.7,23.05 v26.7,23.1
  Route15 0.5: v17.5,26 22.1,26 25,23.1 v26.7,23.1
  Bottom 0.5: v15.6,23.5 17.5,25.4 v17.5,26
USB1:CC1
  Top 0.1: USB1:R4.2 30.1,17 30.35,17.25 USB1:X1.A5
USB1:CC2
  Top 0.1: USB1:X1.B5 29.95,20.25 29.8,20.4 USB1:R5.2
USB1:CP_NRST
  Top 0.1: USB1:U1.9 23.85,24.75 23.4,25.2 21.8,25.2 21,26 USB1:R3.2
USB1:D_N  (via drill 0.2 pad 0.5)
  Top 0.1: USB1:U1.4 26.15,22.25 27,21.4 27,19.4 27.2,19.2 USB1:D1.4 USB1:D1.3 29.9,19.2 | USB1:X1.A7 30.35,18.75 29.9,19.2 | 29.9,19.2 29.8,19.3 v29.9,19.3 | USB1:X1.B7 30.15,17.75 v29.9,17.5
  Bottom 0.1: v29.9,19.3 30.3,19.3 30.7,18.9 30.7,17.8 30.4,17.5 v29.9,17.5
USB1:D_P
  Top 0.1: USB1:X1.B6 32.25,19.25 32.5,19 32.5,18.5 32.25,18.25 USB1:X1.A6 30.35,18.25 30.1,18 29.7,18 29.5,18.2 USB1:D1.1 USB1:D1.6 26.6,18.2 26.3,18.5 26.3,19.1 26.75,19.55 26.75,21.3 26.29,21.75 USB1:U1.3
USB1:N$1
  Top 0.1: USB1:R7.1 18.1,23.5 18.2,23.6 USB1:D3.2
USB1:N$2
  Top 0.1: USB1:R6.1 USB1:D2.2
USB1:RXT
  Top 0.1: USB1:U1.13 20.85,23.25 20.5,23.6 USB1:D3.1
USB1:TXT
  Top 0.1: USB1:D2.1 20.5,22.4 20.85,22.75 USB1:U1.14
USB1:VBUS
  Top 0.1: USB1:U1.8 24.35,24.95 24.2,25.1 USB1:R2.1 USB1:R1.1
USB_NRST
  Top 0.1: R2.2 21.2,24.9 21.25,24.95 22.55,24.95 22.85,24.65 USB1:U1.11
V+  (via drill 0.2 pad 0.5)
  Top 0.1: PSU1:C3.1 27.4,7.5 | PSU1:R1.1 21.35,7.4 PSU1:C2.1 19.95,7.25 v19.9,7.3
  Top 0.55: v2.9,14.2 v2.2,14.2
  Route15 1: v2.2,14.2 v2.9,14.2 3.04,14.2 5.44,11.8 7,11.8 8.2,13 16.7,13 17.6,12.1 19.5,12.1 20.5,13.1 24.2,13.1 27.4,9.9 28.3,9.9 28.9,9.3 v28.9,8.6 v28.9,7.8 v28.9,7
  Bottom 0.1: v19.9,7.3 20.2,7 v28.9,7
  Bottom 0.55: X1.7 4.3,14.7 3.8,14.2 v2.9,14.2 v2.2,14.2
  pour Top (no thermals): 26.7,6.7 26.6,6.7 26.6,9 26.2,9.4 25.8,9.8 25.8,10.9 26,10.9 26,10.1 26.2,9.9 26.8,9.9 29.2,9.9 29.2,6.7
VBAT  (via drill 0.2 pad 0.5)
  Top 0.1: BAT1:R5.2 10.8,28.5 10.7,28.4 | PSU1:IC2.7 24.9,10 24.7,9.8 24.1,9.8 v22.8,11.1
  Top 0.5: BAT1:X1.1 3.88,28.27 4.35,28.75 6.01,28.75 6.36,28.4 10.7,28.4 10.82,28.4 12.5,26.73 BAT1:C4.1
  Route15 1: v26.7,17.5 v25.7,17.5 25.7,17.9 19.6,24 16.5,24 14.8,25.7 v14.3,25.7 | v14.3,25.7 v13.4,25.7 | v19,34.8 v19.8,34.8 v19.8,35.6 v19,35.6 v19,34.8 | v19,34.8 15.7,31.5 15.7,27.1 v14.3,25.7
  Bottom 0.1: v22.8,11.1 25.7,11.1 26.7,12.1 v26.7,15
  pour Top (no thermals): 12.1,27.3 14.8,27.3 14.8,25.5 12.1,25.5
  pour Top (no thermals): 18.7,32.8 22.2,32.8 22.2,36.4 18.6,36.4 18.6,32.8
  pour Top (no thermals): 25.8,13.1 25.8,14.1 25.6,14.3 25.6,15.4 25.4,15.6 25.4,17.8 27,17.8 27,14.9 26,13.9 26,13.1
VBAT_SENSE  (via drill 0.2 pad 0.5)
  Top 0.1: MCU1:U1.9 9.75,14.95 8.5,13.7 8.5,11.7 v8,11.2 | v8.6,29.4 8.8,29.2 BAT1:R5.1 10.25,29.65 10.8,30.2 | 10.8,30.2 | BAT1:R4.2 10.8,30.2
  Bottom 0.1: v8,11.2 6.8,12.4 6.8,14.96 7.85,16.01 7.85,18.15 6.2,19.8 4.7,19.8 3.3,21.2 3.3,25.5 7.2,29.4 v8.6,29.4

## Text on the board
tSilk: ©OpenRecycling